# Altium PCB esp32_gyro.PcbDoc
Units mil, origin at the board's own origin, x right, y up, seen from the top; angles counter-clockwise.
Board outline 1840 x 1525 mil, 2 copper layers (Top Layer, Bottom Layer); 31 components, 19 nets, 144 pads, 25 vias.
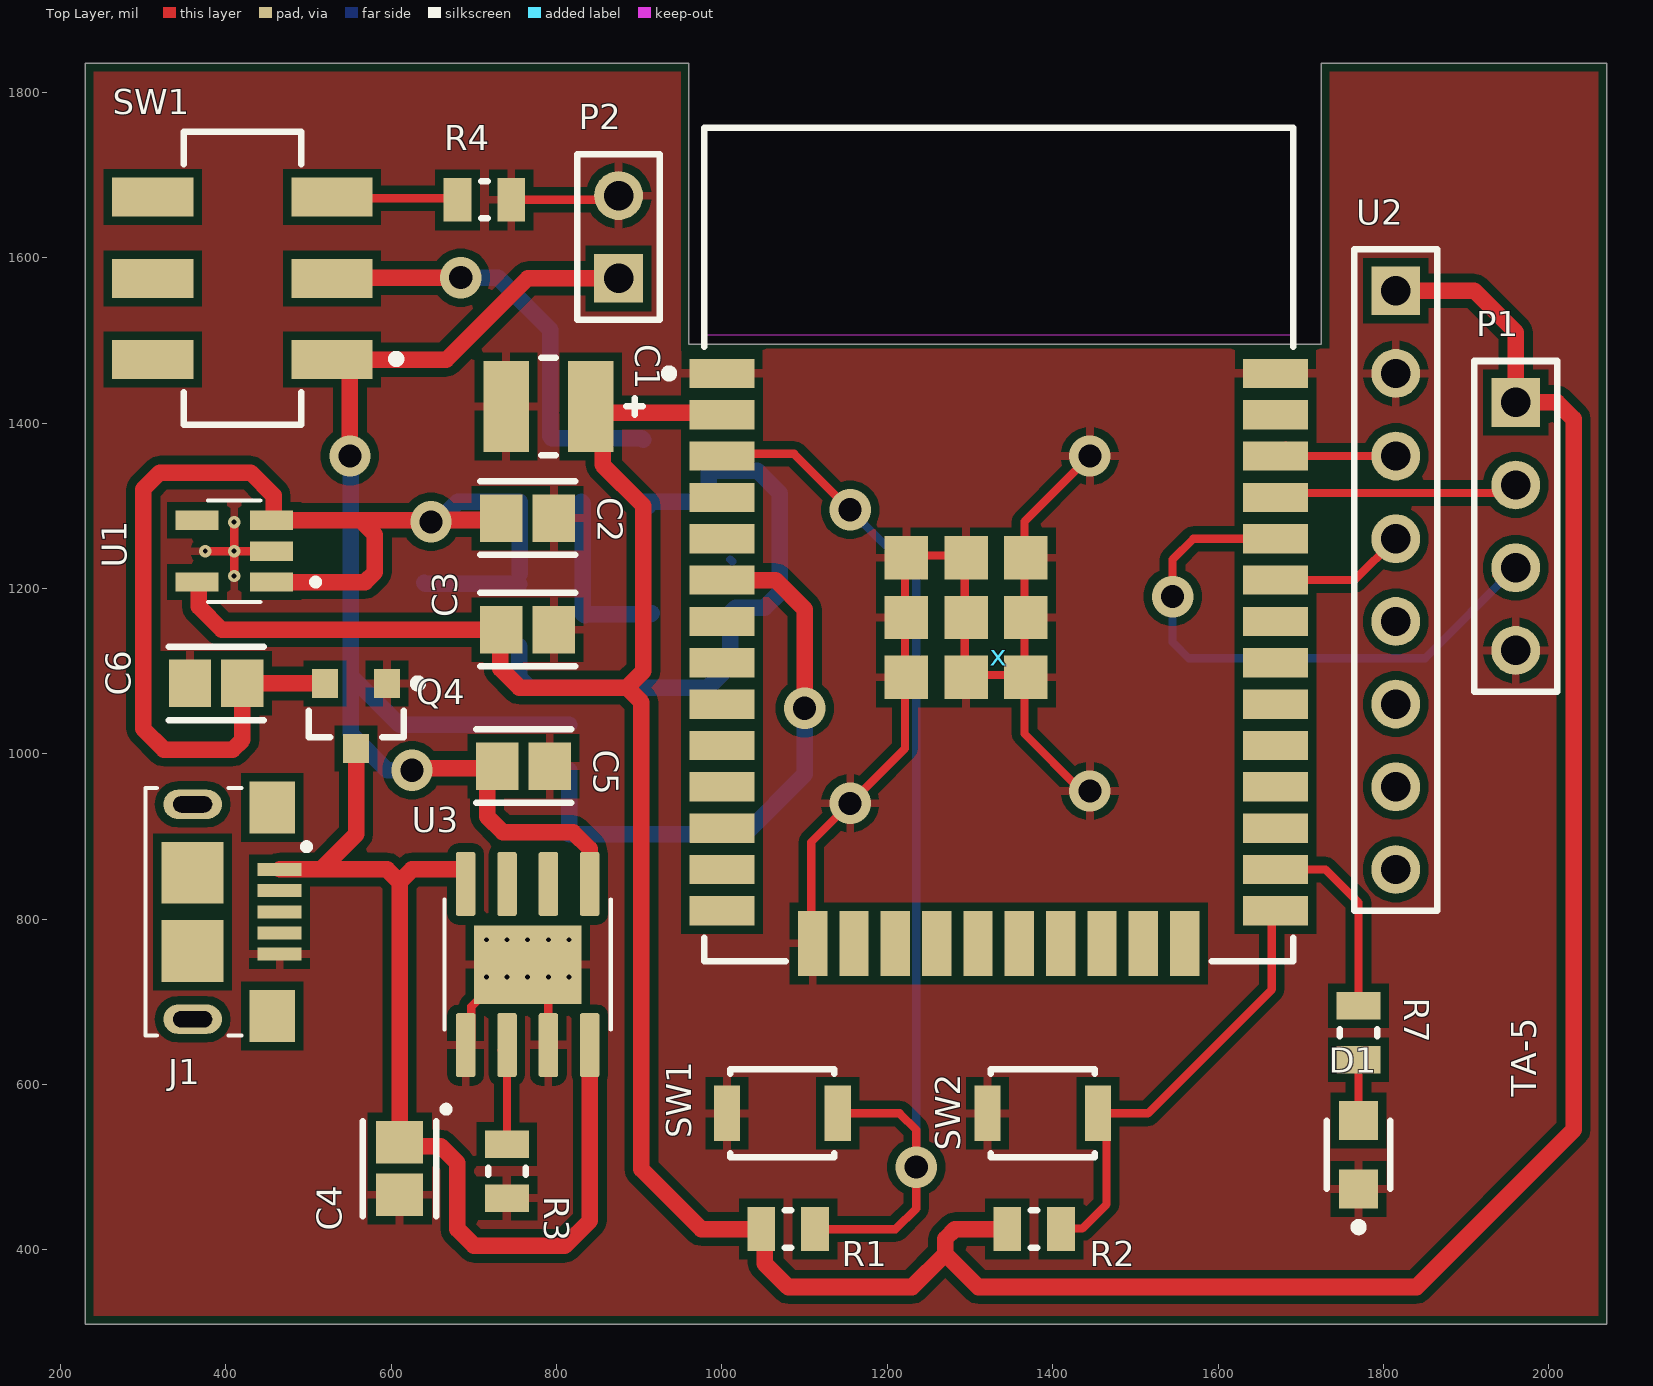
[diagram p0: Top Layer view]
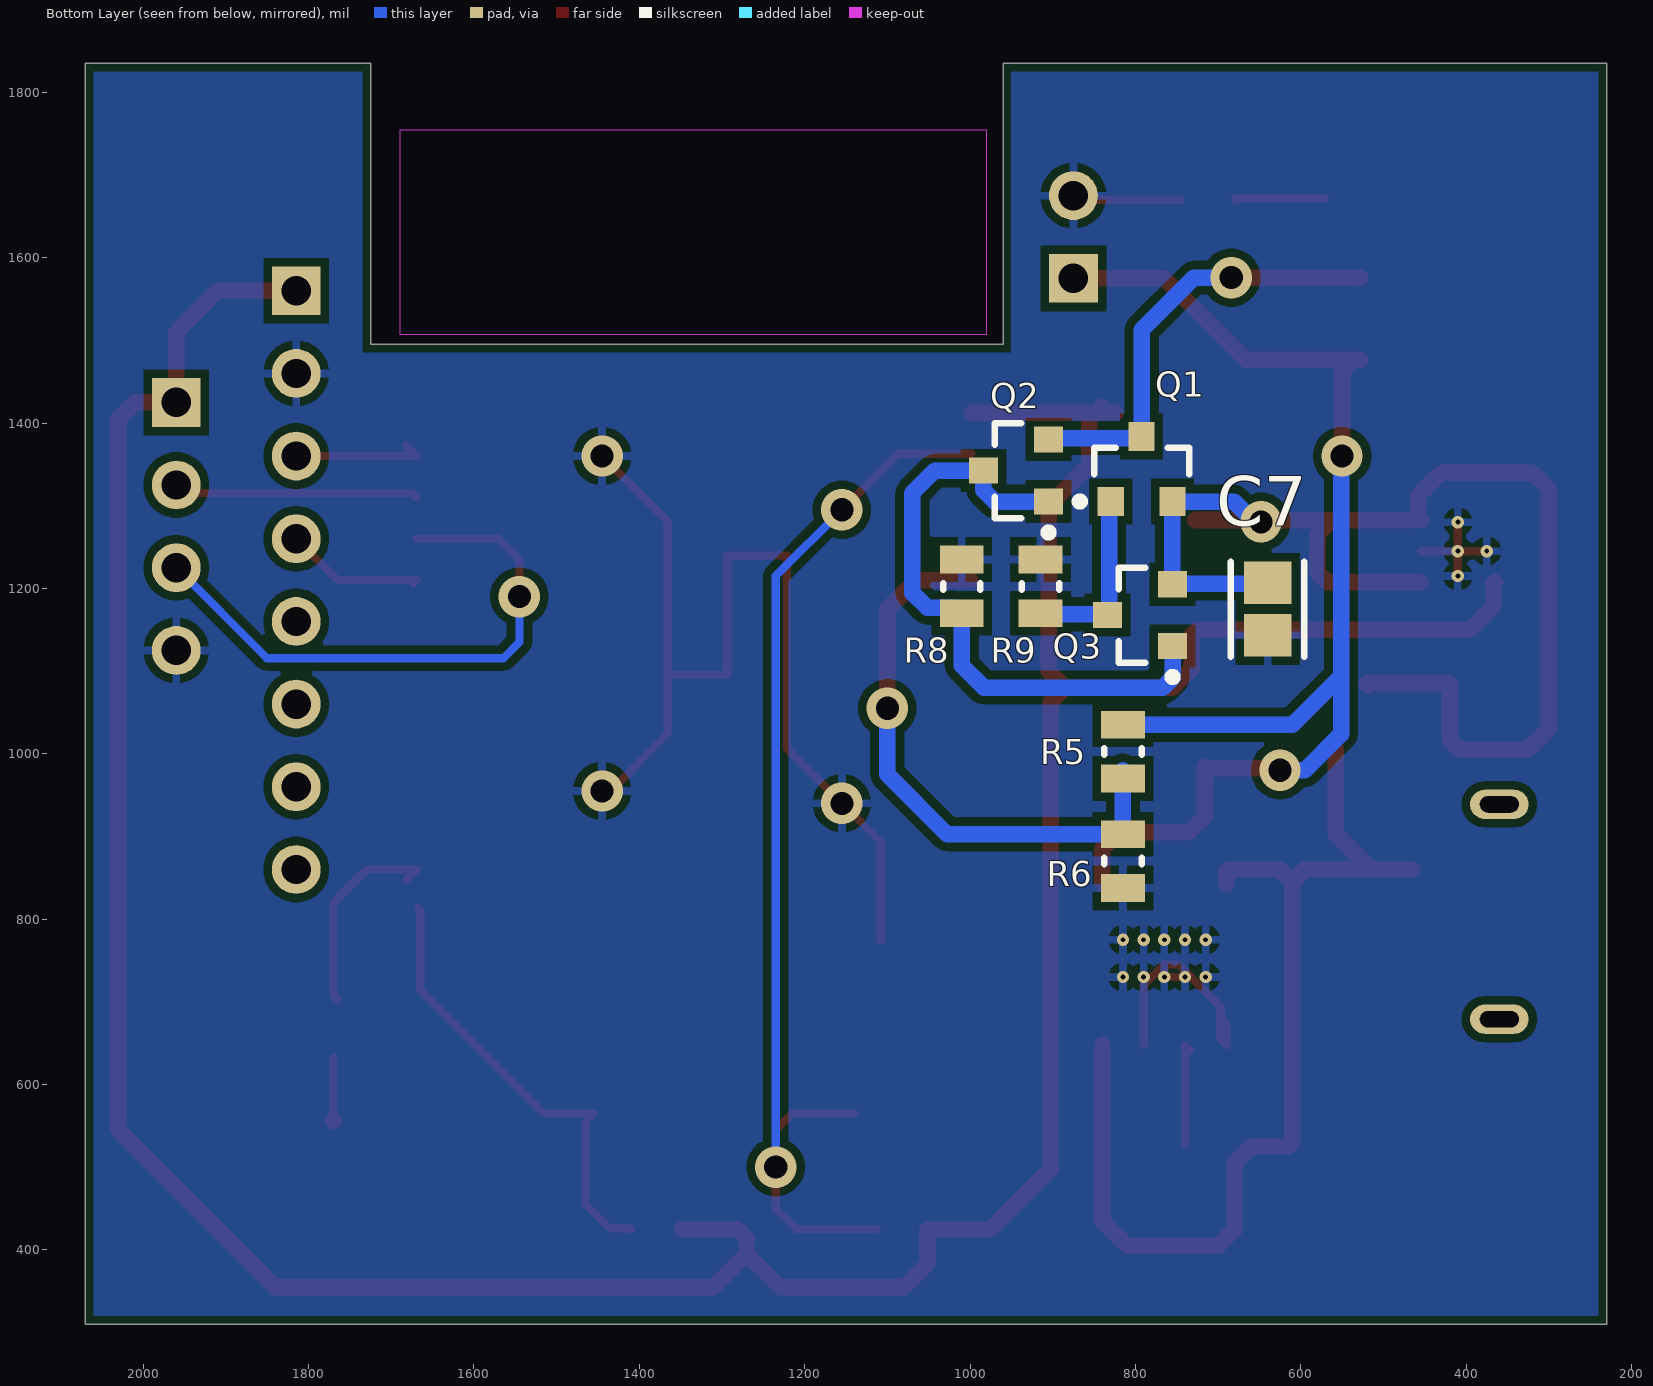
[diagram p1: Bottom Layer view, seen from below]
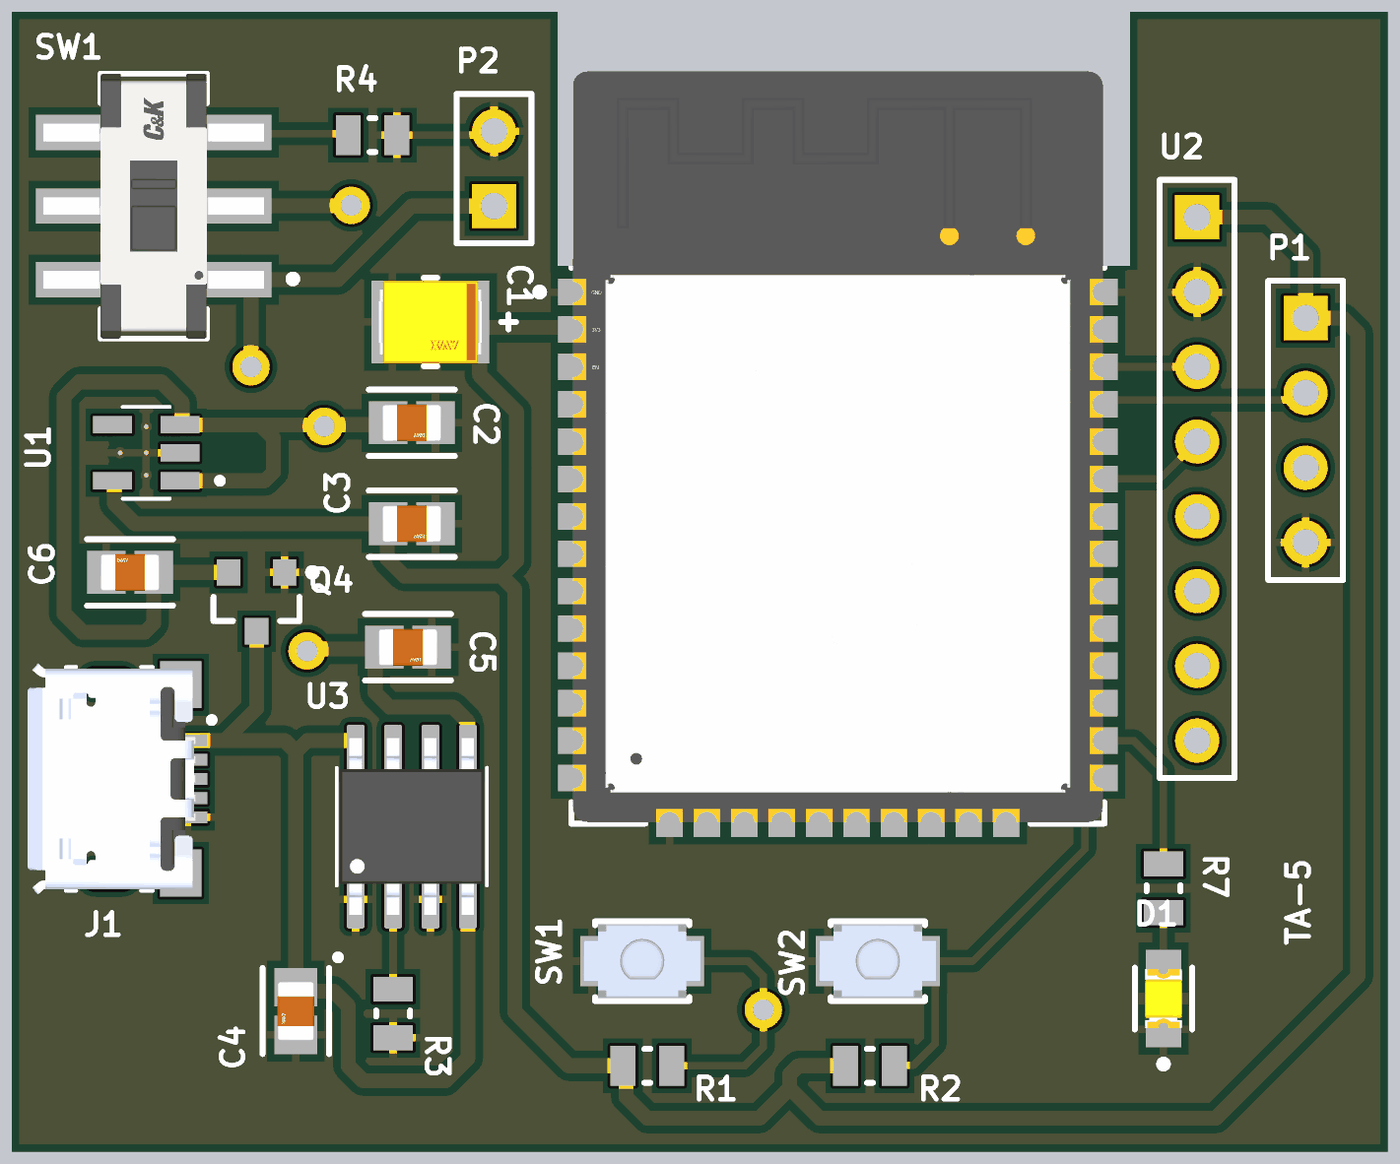
[diagram p2: 3D render of the assembled board from above, using the file's embedded part models]

## Layer stack, top to bottom
Top Solder: solder mask 0.4, Solder Resist, Dk 3.5
Top Layer: signal copper 1.4
Dielectric 1: dielectric 12.6, FR-4, Dk 4.8
Bottom Layer: signal copper 1.4
Bottom Solder: solder mask 0.4, Solder Resist, Dk 3.5

## Board outline
230,310 230,1835 960,1835 960,1495 1725,1495 1725,1835 2070,1835 2070,310

## Design rules (kind name [scope] priority, off if disabled: settings)
Clearance [All] p1: gap=10 ignorepadtopadclearanceinfootprint=FALSE except(0: Arc-Hole Track-Hole SMDPad-Hole THPad-Hole Via-Hole Fill-Hole Poly-Hole Region-Hole Text-Hole)
PolygonConnect [All] p1: connectstyle=Relief reliefconductorwidth=10 reliefentries=4 polygonreliefangle="90 Angle" airgapwidth=10
RoutingVias [All] p1: holewidth=28 width=50 viastyle="Through Hole" minholewidth=28 minwidth=50 maxholewidth=28 maxwidth=50
SolderMaskExpansion [All] p1: expansion=4 istentingtop=FALSE
Width Width_VCC [InNet('VCC')] p1: maxlimit=30 minlimit=20 preferedwidth=20 minimp=50.000000 maximp=50.000000 favimp=50.000000
Width Width_BV [InNet('BV')] p2: maxlimit=30 minlimit=20 preferedwidth=20 minimp=50.000000 maximp=50.000000 favimp=50.000000
Width Width_BV2 [InNet('BV_2')] p3: maxlimit=30 minlimit=20 preferedwidth=20 minimp=50.000000 maximp=50.000000 favimp=50.000000
Width Width_BV1 [InNet('BV_1')] p4: maxlimit=30 minlimit=20 preferedwidth=20 minimp=50.000000 maximp=50.000000 favimp=50.000000
Width Width_2 [InNet('NetC4_1')] p5: maxlimit=30 minlimit=20 preferedwidth=20 bottomlayer_maxwidth=20 minimp=50.000000 maximp=50.000000 favimp=50.000000
Width Width_1 [InNet('NetC5_2')] p6: maxlimit=30 minlimit=20 preferedwidth=20 minimp=50.000000 maximp=50.000000 favimp=50.000000
Width [All] p7: maxlimit=20 minlimit=10 preferedwidth=10 minimp=50.000000 maximp=50.000000 favimp=50.000000
30 further rules are at their usual default settings.

## Components (designator, comment, footprint, x,y, rotation, side; value= is the part's Value field where it differs from the comment)
C1 "100uF" FP-TAJB-MFG 790,1420 r0 top
C2 "10u" FP-0805-L_2_01_0_2-W_1_25-IPC_B 765,1285 r0 top
C3 "10u" FP-0805-L_2_01_0_2-W_1_25-IPC_B 765,1150 r0 top
C4 "10u" FP-0805-L_2_01_0_2-W_1_25-IPC_B 610,498.28 r270 top
C5 "10u" FP-0805-L_2_01_0_2-W_1_25-IPC_B 760,985 r0 top
C6 "10u" FP-0805-L_2_01_0_2-W_1_25-IPC_B 388.28,1085 r180 top
C7 "10u" FP-0805-L_2_01_0_2-W_1_25-IPC_B 640,1175 r270 bottom
D1 "APHCM2012SYCK-F01" FP-APHCM2012SYCK-F01-MFG 1770,515 r90 top
J1 "10118193-0001LF" FCI_10118193-0001LF 359.69,808.82 r270 top
P1 "Header 4" HDR1X4 1960,1425 r270 top
P2 "Header 2" HDR1X2 875,1575 r90 top
Q1 "NTR4502PT1G" ONSC-SOT-23-3-318-08_V 792.4,1344.37 r90 bottom
Q2 "NTR4502PT1G" ONSC-SOT-23-3-318-08_V 944.37,1342.4 r0 bottom
Q3 "NTR4502PT1G" ONSC-SOT-23-3-318-08_V 794.37,1167.6 r0 bottom
Q4 "NTR4502PT1G" ONSC-SOT-23-3-318-08_V 557.4,1045.63 r270 top
R1 "10k" RESC2013X50X30LL20T20 1080,425 r180 top
R2 "10k" RESC2013X50X30LL20T20 1377.48,425 r180 top
R3 "1k" RESC2013X50X30LL20T20 740,495 r90 top
R4 "1k" RESC2013X50X30LL20T20 712.52,1670 r180 top
R5 "4.7k" RESC2013X50X30LL20T20 815,1002.52 r270 bottom
R6 "11k" RESC2013X50X30LL20T20 815,870 r90 bottom
R7 "1k" RESC2013X50X30LL20T20 1770,662.52 r270 top
R8 "10k" RESC2013X50X30LL20T20 1010,1202.52 r270 bottom
R9 "10k" RESC2013X50X30LL20T20 915,1202.48 r270 bottom
SW1 "JS202011SCQN" FP-JS202011SCQN-MFG 420,1575 r90 top
SW1 "B3U-1000P" FP-B3U-1000P-MFG 1073.07,565 r180 top
SW2 "B3U-1000P" FP-B3U-1000P-MFG 1388.07,565 r180 top
U1 "SPX3819M5-L-3-3" SOT95P280X145-5N 410,1245 r180 top
U2 "Header 8" HDR1X8 1815,1560 r270 top
U3 "TP4056" SOP127P600X175-9N 765,745 r90 top
x "ESP32-WROOM-32" FP-ESP32-WROOM-32-MFG 1334.65,1252.91 r0 top

## Footprints (in the part's own frame and the unit in brackets; to place one, negate y for a bottom-side part, rotate by r counter-clockwise, add the part's x,y. Pads: shape width x height; smd on the part's side, far side on the other; paste and mask are expansions set on the pad)
FCI_10118193-0001LF [mm] "USB, MICRO B, Body 7.491x4.695 mm, Pitch 0.65 mm"
  rect 0.4x1.35 smd: 1(-1.3,2.675) 2(-0.65,2.675) 3(0,2.675) 4(0.65,2.675) 5(1.3,2.675)
  rect 1.6x1.4 smd: S1(-3.2,2.45) S2(3.2,2.45)
  rect 1.9x1.9 smd: S3(1.2,0) S4(-1.2,0)
  oval 0.9x1.8 hole 0.5 slot 1.2 at 90 deg: S5(-3.3,0) S6(3.3,0)
  round 0.5 hole 0.5 unplated: ""(-3.3,0) ""(3.3,0)
  silkscreen extent -3.8,-1.45 3.8,3.6, body extent -3.93,-2.76 3.93,2.95, height 2.85
FP-0805-L_2_01_0_2-W_1_25-IPC_B [mil]
  rect 51.36x57.33 smd paste+0 mask+0: 1(-31.72,0) 2(31.72,0)
  silkscreen extent -57,-44 57,44, body extent -67,-39 67,39, height 10
FP-APHCM2012SYCK-F01-MFG [mm]
  rect 1.2x1.2 smd paste+0 mask+0: 1(-1.05,0) 2(1.05,0)
  silkscreen extent -2.35,-0.97 1.05,0.97, body extent -1.75,-0.77 1.75,0.77, height 0.25
FP-B3U-1000P-MFG [mm]
  rect 0.8x1.7 smd paste+0 mask+0: 1(-1.7,0) 2(1.7,0)
  silkscreen extent -1.6,-1.35 1.6,1.35, body extent -2.2,-1.45 2.2,1.45, height 0.25
FP-ESP32-WROOM-32-MFG [mm]
  rect 2x0.9 smd paste+0 mask+0: 1(-8.5,5.26) 2(-8.5,3.99) 3(-8.5,2.72) 4(-8.5,1.45) 5(-8.5,0.18) 6(-8.5,-1.09) 7(-8.5,-2.36) 8(-8.5,-3.63) 9(-8.5,-4.9) 10(-8.5,-6.17) 11(-8.5,-7.44) 12(-8.5,-8.71) 13(-8.5,-9.98) 14(-8.5,-11.25) 25(8.5,-11.25) 26(8.5,-9.98) 27(8.5,-8.71) 28(8.5,-7.44) 29(8.5,-6.17) 30(8.5,-4.9) 31(8.5,-3.63) 32(8.5,-2.36) 33(8.5,-1.09) 34(8.5,0.18) 35(8.5,1.45) 36(8.5,2.72) 37(8.5,3.99) 38(8.5,5.26)
  rect 0.9x2 smd paste+0 mask+0: 15(-5.715,-12.25) 16(-4.445,-12.25) 17(-3.175,-12.25) 18(-1.905,-12.25) 19(-0.635,-12.25) 20(0.635,-12.25) 21(1.905,-12.25) 22(3.175,-12.25) 23(4.445,-12.25) 24(5.715,-12.25)
  rect 1.33x1.33 smd paste+0 mask+0: 39(-2.835,-4.075) 39(-2.835,-2.24) 39(-2.835,-0.405) 39(-1,-4.075) 39(-1,-2.24) 39(-1,-0.405) 39(0.835,-4.075) 39(0.835,-2.24) 39(0.835,-0.405)
  Keep-Out Layer region: -9,6.45 9,6.45 9,12.75 -9,12.75
  Keep-Out Layer region: -9,6.45 9,6.45 9,12.75 -9,12.75
  silkscreen extent -10.25,-12.8 9.05,12.8, body extent -9.6,-13.35 9.6,12.9, height 0.25
FP-JS202011SCQN-MFG [mm]
  rect 1.2x2.5 smd paste+0 mask+0: 1(-2.5,-2.75) 2(0,-2.75) 3(2.5,-2.75) 4(-2.5,2.75) 5(0,2.75) 6(2.5,2.75)
  silkscreen extent -4.5,-4.85 4.5,1.8, body extent -4.6,-4.1 4.6,4.1, height 0.25
FP-TAJB-MFG [mm]
  rect 1.4x2.8 smd paste+0 mask+0: 1(-1.3,0) 2(1.3,0)
  silkscreen extent -0.23,-1.5 2.9,1.5, body extent -2.1,-1.6 2.1,1.6, height 0.25
HDR1X2 [mm] "Connector; Header; 2 Position"
  rect 1.5x1.5 hole 0.9: 1(0,0)
  round 1.5 hole 0.9: 2(2.54,0)
  silkscreen extent -1.27,-1.27 3.81,1.27
HDR1X4 [mm] "Connector; Header; 4 Position"
  rect 1.5x1.5 hole 0.9: 1(0,0)
  round 1.5 hole 0.9: 2(2.54,0) 3(5.08,0) 4(7.62,0)
  silkscreen extent -1.27,-1.27 8.89,1.27
HDR1X8 [mm] "Connector; Header; 8 Position"
  rect 1.5x1.5 hole 0.9: 1(0,0)
  round 1.5 hole 0.9: 2(2.54,0) 3(5.08,0) 4(7.62,0) 5(10.16,0) 6(12.7,0) 7(15.24,0) 8(17.78,0)
  silkscreen extent -1.27,-1.27 19.05,1.27
ONSC-SOT-23-3-318-08_V [mm] "SOT23, 3-Leads, Body 2.92x1.3mm, Pitch 0.95mm"
  rect 0.9x0.8 smd: 1(-1,0.95) 2(-1,-0.95) 3(1,0)
  silkscreen extent -1.12,-1.46 0.65,2.03, body extent -0.65,-1.46 0.65,1.46, height 1.11
RESC2013X50X30LL20T20 [mm] "Chip Resistor, 2-Leads, Body 2.00x1.25mm, IPC High Density"
  rect 0.85x1.35 smd: 1(-0.825,0) 2(0.825,0)
  silkscreen extent -0.1,-0.58 0.1,0.58, body extent -1.1,-0.72 1.1,0.72, height 0.5
SOP127P600X175-9N [mm]
  rrect25% 1.97x0.6 smd: 1(-2.475,1.905) 2(-2.475,0.635) 3(-2.475,-0.635) 4(-2.475,-1.905) 5(2.475,-1.905) 6(2.475,-0.635) 7(2.475,0.635) 8(2.475,1.905)
  rect 2.413x3.302 smd paste-3: 9(0,0)
  silkscreen extent -4.54,-2.55 2,2.6, body extent -3,-2.45 3,2.45, height 1.75
SOT95P280X145-5N [mm]
  rect 1.32x0.59 smd: 1(-1.145,0.95) 2(-1.145,0) 3(-1.145,-0.95) 4(1.145,-0.95) 5(1.145,0.95)
  silkscreen extent -2.6,-1.56 0.8,1.56

## Part data
C1: library part CMP-04424-000592-1, "100uF 6.3V  ±20% 1.7Ω 1210  SMD Tantalum Capacitor", Case Code (Imperial)=1210, Case Code (Metric)=3528, ESR (Equivalent Series Resistance)=1.7R, Leakage Current=6.3uA, Max Operating Temperature=125°C, Min Operating Temperature=-55°C, Package Quantity=1, Tolerance=20%, Voltage Rating=6.3V, Capacitance=100uF, Case/Package=1210, Construction=Flat, Depth=2.8mm, Dissipation Factor=10%, Features="General Purpose", Height=2.1mm, Height - Seated (Max)=0.083inch, Lead Free="Lead Free", Length=3.5mm, Mount="Surface Mount", Number of Pins=2, Packaging="Tape and Reel", Polarity=Polar, Radiation Hardening=No, REACH SVHC="No SVHC", RoHS Compliant=Yes, Series=TAJ, Termination=SMD/SMT, Voltage Rating (DC)=6.3V, Width=2.8mm
C2 C3 C4 C5 C6 C7: library part CMP-2000-05016-2, "General Purpose Ceramic Capacitor, 0805, 100nF, 10%, X7R, 0.15, 50V", Capacitance=100nF, Case Code (Imperial)=0805, Case Code (Metric)=2012, Dielectric=X7R, Dielectric Material=Ceramic, Insulation Resistance=100GR, Max Operating Temperature=125°C, Min Operating Temperature=-55°C, Package Quantity=4000, Tolerance=10%, Voltage=50V, Case/Package=0805, Depth=1.25mm, Dissipation Factor=2.5%, Height=0.5mm, Lead Free="Lead Free", Length=2mm, Mount="Surface Mount", Number of Pins=2, Packaging="Cut Tape", Radiation Hardening=No, REACH SVHC="No SVHC", RoHS Compliant=Yes, Series="MLCC X7R", Termination=Standard, Thickness=0.037inch, Voltage Rating=50V, Voltage Rating (DC)=50V, Weight=0.001411oz, Width=1.2mm
D1: library part CMP-44529-000064-1, "LED YELLOW CLEAR CHIP SMD", Case Code (Imperial)=0805, Case Code (Metric)=2012, Color=Yellow, Forward Current=20mA, Forward Voltage=2V, Illumination Color=Green, Lens Color=Clear, Max Operating Temperature=85°C, Min Operating Temperature=-40°C, Package Quantity=2000, Case/Package=0805, Dominant Wavelength=590nm, Height=0.4mm, Lead Free="Lead Free", Length=2mm, Lens Style=Clear, Luminous Intensity=150mcd, Mount="Surface Mount", Number of LEDs=1, Number of Pins=2, Packaging="Tape and Reel", RoHS Compliant=Yes, Series=APHCM, Test Current=20mA, Viewing Angle=110°, Wavelength=590nm, Width=1.25mm
J1: "USB - micro B USB 2.0 Receptacle Connector 5 Position Surface Mount, Right Angle; Through Hole", Package=None, Availability="In Stock", Check_prices=https://www.snapeda.com/parts/10118193-0001LF/Amphenol+FCI/view-part/?ref=eda, MF=FCI, MP=10118193-0001LF, Price=None, Purchase-URL=https://pricing.snapeda.com/search/part/10118193-0001LF/?ref=eda, SnapEDA_Link=https://www.snapeda.com/parts/10118193-0001LF/Amphenol+FCI/view-part/?ref=snap
P1: "Header, 4-Pin", LatestRevisionDate=17-Jul-2002, LatestRevisionNote="Re-released for DXP Platform.", Publisher="Altium Limited"
P2: "Header, 2-Pin", LatestRevisionDate=17-Jul-2002, LatestRevisionNote="Re-released for DXP Platform.", Publisher="Altium Limited"
Q1 Q2 Q3 Q4: library part CMP-1058-00734-1, "Power MOSFET, -30 V, -1.95 A, Single, P-Channel, 3-Pin SOT-23, Pb-Free, Tape and Reel", Manufacturer="On Semiconductor", Package Type=SOT-23-3, Channel Polarity="P Channel", Ciss Typ (pF)=200, ComponentLink1Description="Manufacturer URL", ComponentLink1URL=http://www.onsemi.com/, ComponentLink2Description=Datasheet, ComponentLink2URL=http://www.onsemi.cn/pub_link/Collateral/NTR4502P-D.PDF, ComponentLink3Description="Package Specification", ComponentLink3URL=http://www.onsemi.cn/pub_link/Collateral/318-08.PDF, Configuration=Single, Coss Typ (pF)=80, Crss Typ (pF)=50, DatasheetVersion="Rev. 5", ID Max (A)=1.95, Mounting Technology="Surface Mount", PackageDescription="3-Pin Small Outline Transistor, Body 2.92 x 1.3 mm, Pitch 0.95 mm", PackageReference=SOT-23-3-318-08, PackageVersion="Rev. AP, 11/2009", Packing="Tape and Reel", PartNumber=NTR4502PT1G, RoHS=Pb-Free, V(BR)DSS Min (V)=30, VGS Max (V)=20, VGS(th) Max (V)=3
R1 R2 R3 R4 R5 R6 R7 R8 R9: library part CMP-2001-04896-1, Manufacturer="Vishay Dale", Part Number=CRCW08050000Z0EA
SW1: library part CMP-2000-05087-3, "SWITCH SLIDE DPDT 300MA 6V", Actuator Color=Black, Contact Current Rating=300mA, Contact Resistance=70mR, Flammability Rating="UL94 V-2", Max Operating Temperature=85°C, Max Voltage Rating (DC)=6V, Min Operating Temperature=-20°C, Package Quantity=1, Actuator Length=2mm, Actuator Material=Nylon, Actuator Type=Standard, Contact Material="Copper Alloy", Contact Plating=Silver, Current Rating=300mA, Depth=7.5mm, Electrical Life=5000Cycles, Housing Material=Nylon, Lead Free="Lead Free", Length=9mm, Max Current Rating=300mA, Mount="Surface Mount", Orientation=Vertical, Packaging="Tape and Reel", Radiation Hardening=No, REACH SVHC="No SVHC", Series=JS, Switch Function=On-On, Switch Travel=2mm, Termination="Gull Wing", Throw Configuration=DPDT, Voltage Rating (DC)=6V
SW1 SW2: library part CMP-2100-03586-2, "SWITCH TACTILE SPST-NO 0.05A 12V", Contact Current Rating=50mA, Contact Resistance=100mR, Insulation Resistance=100MR, Max Operating Temperature=70°C, Max Voltage Rating (DC)=12V, Min Operating Temperature=-25°C, Operating Force=1.5N, Package Quantity=1, Ratings="Dust Proof", Actuator Length=0.4mm, Actuator Type=Standard, Contact Material=Silver, Current Rating=50mA, Depth=2.5mm, Electrical Life=200000Cycles, Height=1.2mm, Illumination Type=Non-Illuminated, Lead Free="Lead Free", Length=4mm, Max Current Rating=50mA, Mechanical Life=200000Cycles, Mount="Surface Mount", Orientation=Straight, Packaging="Tape and Reel", Switch Function=Off-Mom, Switch Travel=0.15mm, Termination=SMD/SMT, Throw Configuration=SPST, Voltage Rating (DC)=12V, Weight=0.000776oz, Width=3mm
U1: "Linear Voltage Regulator IC Positive Fixed 1 Output 500mA SOT-23-5", Package="SOT-23-5 Exar", Availability="In Stock", Check_prices=https://www.snapeda.com/parts/SPX3819M5-L-3-3/TR/MaxLinear%252C+Inc./view-part/?ref=eda, MF="MaxLinear, Inc.", MP=SPX3819M5-L-3-3/TR, Price=None, Purchase-URL=https://pricing.snapeda.com/search/part/SPX3819M5-L-3-3/TR/?ref=eda, SnapEDA_Link=https://www.snapeda.com/parts/SPX3819M5-L-3-3/TR/MaxLinear%252C+Inc./view-part/?ref=snap
U2: "Header, 8-Pin", LatestRevisionDate=17-Jul-2002, LatestRevisionNote="Re-released for DXP Platform.", Publisher="Altium Limited"
U3: "Complete single cell Li-Ion battery with a constant current / constant voltage linear charger", Package=Package, Availability="Not in stock", Check_prices=https://www.snapeda.com/parts/TP4056/NanJing+Top+Power+ASIC+Corp./view-part/?ref=eda, MF="NanJing Top Power ASIC Corp.", MP=TP4056, Price=None, SnapEDA_Link=https://www.snapeda.com/parts/TP4056/NanJing+Top+Power+ASIC+Corp./view-part/?ref=snap
x: library part CMP-194065-000008-1, "RX TXRX MOD WIFI SURFACE MOUNT", Case/Package=SMD/SMT, Frequency=2.5GHz, Max Operating Temperature=85°C, Min Operating Temperature=-40°C, Operating Supply Voltage=3.6V, Package Quantity=550, Data Rate=150Mbps, Mount="Surface Mount", Packaging="Cut Tape", Sensitivity=-98dBm, Weight=0.088185oz

## Via types
v1: diameter 15, hole 6, Top Layer to Bottom Layer, tented both sides, 14 vias
v2: diameter 50, hole 28, Top Layer to Bottom Layer, 6 vias
v3: diameter 50, hole 28, Top Layer to Bottom Layer, tented both sides, 5 vias

## Nets (pads, with @x,y where several pads share a name; then routed paths per layer and width w, separated by ;. In a path a pad name is that pad's centre, name@x,y a point inside that pad or via, vN(x,y) a via of type N, cw(c..) or ccw(c..) an arc to the next point about the centre after c; other vN are vias at no path point)
BV: C5.1 P2.1 R5.1 SW1.1@528.27,1476.57 U3.5 | length 1570.2
  Top Layer w20: v2(550,1360) 550,1462.95 536.38,1476.57 528.27,1476.57 666.57,1476.57 765,1575 P2.1 ; v2(625,980) 627.5,982.5 714.29,982.5 715.94,984.15 715.94,924.06 735,905 820,905 840,885 U3.5
  Bottom Layer w20: v2(550,1360) 551.22,1358.78 551.22,1093.78 ; v2(625,980) 595,980 551.22,1023.78 551.22,1093.78 ; R5.1 610,1035 551.22,1093.78
BV_1: Q1.3 Q2.2 SW1.2@528.27,1575 | length 533.8
  Top Layer w20: SW1.2@528.27,1575 528.72,1575.45 683.66,1575.45 v2(684.11,1575.89)
  Bottom Layer w20: v2(684.11,1575.89) 729.11,1575.89 792.4,1512.6 Q1.3 794.37,1381.77 903.03,1381.77 Q2.2
BV_2: C2.1 C6.1 C7.1 Q1.2 Q3.2 Q4.2 U1.1 U1.3 | length 1594.2
  Top Layer w20: U1.1 568.28,1207.6 580,1219.31 580,1265 562.6,1282.4 ; U1.3 456.09,1282.4 457.7,1284.02 457.7,1312.3 430,1340 320,1340 300,1320 300,1030 325,1005 408.28,1005 420,1016.72 C6.1 Q4.2 Q4.2@517.5,1082.5 ; U1.3@463.39,1282.4 562.6,1282.4 ; C2.1@727.41,1282.41 727.14,1282.69 650.28,1282.69 v2(647.97,1280.39) 645.95,1282.4 562.6,1282.4
  Bottom Layer w20: C7.1 640.86,1205.86 754.14,1205.86 Q3.2 ; v2@649.26,1279.1 v2(647.97,1280.39) 656.09,1280.39 680.7,1305 Q1.2 755.32,1304.68 Q3.2@755.32,1217.72
GND: C1.1 C2.2 C3.2 C4.2 C5.2 C6.2 C7.2 D1.1 J1.5 P1.4 P2.2 Q4.1 R3.1 R4.1 R6.1 R8.1 R9.1 SW1.2@1006.14,565 SW2.2 U1.2 U2.2 U3.1 U3.3 U3.9 x.1 x.15 x.38 x.39 | length 1873.4
  Top Layer w10: v1(375,1245) v1(410,1245) ; v1(410,1215) v1(410,1245) ; v1(410,1280) v1(410,1245) ; U1.2 v1(410,1245) ; U3.1@690,674.53 U3.1 696.81,654.37 696.81,694.31 U3.9@740,737.5 ; R4.1 P2.2@870,1670 ; U3.3 790,720 U3.9 ; x.15@1107.97,773.38 1107.97,892.97 1221.36,1006.36 1221.36,1239.72 1293.6,1239.72 1293.6,1095.23 x.39@1365.85,1095.23 ; v3(1445,955) 1435,955 1365.85,1024.15 x.39@1365.85,1095.23 ; v3(1445,1360) 1365.85,1280.85 x.39@1365.85,1095.23 ; U3.9@740,737.5 v1(740,730) v1(765,730) U3.9 ; U3.9@740,737.5 747.5,745 U3.9
  Bottom Layer w10: R8.1 R8.1@1012.52,1232.48
  other v1: 715,730 790,730 815,730 715,775 740,775 765,775 790,775 815,775
  other v3: 1155,940
NetC4_1: C4.1 J1.1 Q4.3 U3.4 U3.8 | length 1286.4
  Top Layer w20: J1.1 515,860 ; Q4.3 557.4,902.4 515,860 ; U3.8 690,858.19 688.19,860 625,860 610,845 ; U3.4 840,435 810,405 700,405 680,425 680,505 660,525 615,525 C4.1 610,845 ; 515,860 595,860 610,845
NetD1_2: D1.2 R7.2 | length 77.2
  Top Layer w10: D1.2 R7.2@1770,632.52
  Top Layer w20: D1.2@1769.31,555.65 D1.2
NetP1_2: P1.2 x.35 | length 296.9
  Top Layer w10: x.35 1674.76,1315.47 1937.2,1315.47 1946.73,1325 P1.2
NetP1_3: P1.3 x.34 | length 729.9
  Top Layer w10: v3(1545,1190) 1545,1235 1570,1260 x.34 ; P1.3@1937.2,1215.47 1946.73,1225 P1.3
  Bottom Layer w10: v3(1545,1190) 1545,1135 1564.53,1115.47 1850.47,1115.47 P1.3
NetQ1_1: Q1.1 Q3.3 R9.2 | length 221.3
  Bottom Layer w20: Q1.1 831.77,1303.03 831.77,1169.57 Q3.3 834.94,1168.8 913.8,1168.8 R9.2
NetQ2_1: Q2.1 Q2.3 Q3.1 R8.2 | length 776.9
  Bottom Layer w20: Q3.1 755,1091.72 766.72,1080 983.28,1080 1010,1106.72 R8.2 1016.54,1176.57 1051.57,1176.57 1070,1195 1070,1315 1042.6,1342.4 Q2.3 983.74,1318.74 970,1305 Q2.1 Q2.1@910.75,1299.25
NetR1_1: R1.1 SW1.1@1140,565 x.3 | length 1344
  Top Layer w10: x.3@998.33,1362.75 1087.25,1362.75 v3(1155,1295) ; R1.1 1210,425 1235,450 1235,545 1215,565 SW1.1@1140,565
  Bottom Layer w10: v3(1155,1295) 1235,1215 v2(1235,500)
NetR2_1: R2.1 SW2.1 x.25 | length 552.6
  Top Layer w10: R2.1 1410.8,425.83 1435.84,425.83 1465,455 1465,555 SW2.1 1460,565 1515,565 1665,715 1665,810.13 x.25@1667.62,812.75
NetR3_2: R3.2 U3.2 | length 128.9
  Top Layer w10: U3.2@733.78,641.34 U3.2 R3.2
NetR4_2: R4.2 SW1.3 | length 109.8
  Top Layer w10: SW1.3@570.98,1671.85 678.19,1671.85 R4.2
NetR5_2: R5.2 R6.2 x.6 | length 707.1
  Top Layer w20: x.6 1065,1210 1100,1175 v2(1100,1055)
  Bottom Layer w20: R5.2@815,980 R6.2 1027.48,902.48 1100,975 v2(1100,1055)
NetR7_1: R7.1 x.26 | length 254.8
  Top Layer w10: x.26@1682.01,847.28 x.26 1730,860 1770,820 1770,707.51 R7.1@1764.98,702.5
NetU2_3: U2.3 x.36 | length 176.4
  Top Layer w10: x.36@1682.01,1372.72 x.36 U2.3 U2.3@1815,1372.73
NetU2_4: U2.4 x.33 | length 172.3
  Top Layer w10: x.33@1673.42,1205.87 x.33 1765,1210 U2.4
VCC: C1.2 C3.1 P1.1 R1.2 R2.2 U1.5 U2.1 x.2 | length 4349.5
  Top Layer w20: U1.5 365.69,1207.6 367.3,1205.98 367.3,1177.7 395,1150 725,1150 731.95,1143.05 731.95,1103.05 755,1080 885,1080 ; C1.2@823.62,1412.56 C1.2@841.18,1412.56 ; C1.2 855.64,1405.54 855.64,1349.36 905,1300 905,1100 885,1080 ; C1.2@855.64,1412.56 x.2@998.14,1412.56 ; R2.2@1348.16,425 R2.2 1281.72,425 1270,413.28 1270,395 ; U2.1 1910,1560 1960,1510 P1.1 2010,1425 2030,1405 2030,545 1840,355 1310,355 1270,395 ; 885,1080 902.5,1062.5 902.5,497.5 975,425 R1.2 1050,425 1051.63,423.37 1051.63,383.37 1080,355 1230,355 1270,395
pads on no net: J1. J1.2 J1.3 J1.4 J1.S1 J1.S2 J1.S3 J1.S4 J1.S5 J1.S6 SW1.4 SW1.5 SW1.6 U1.4 U2.5 U2.6 U2.7 U2.8 U3.6 U3.7 x.4 x.5 x.7 x.8 x.9 x.10 x.11 x.12 x.13 x.14 x.16 x.17 x.18 x.19 x.20 x.21 x.22 x.23 x.24 x.27 x.28 x.29 x.30 x.31 x.32 x.37

## Polygon pours and split planes (outlines as drawn)
GND on Top Layer "NONET_L-01_P-001" (solid, remove dead copper, pour order 0): 240,1825 240,320 2060,320 2060,1825 1735,1825 1735,1490 950,1490 950,1825
GND on Bottom Layer "NONET_L-01_P-001" (solid, remove dead copper, pour order 1): 240,1825 240,320 2060,320 2060,1825 1735,1825 1735,1485 950,1485 950,1825

## Silkscreen, mask and mechanical layers (free items; w line width, h text height)
Top Overlay:
  text "TA-5" at 1985,585 h30 r90
Mechanical 1:
  the board outline again, w19.68